# EAGLE board DMB-4770-8-IN-8-OUT (EAGLE 6.5.0)
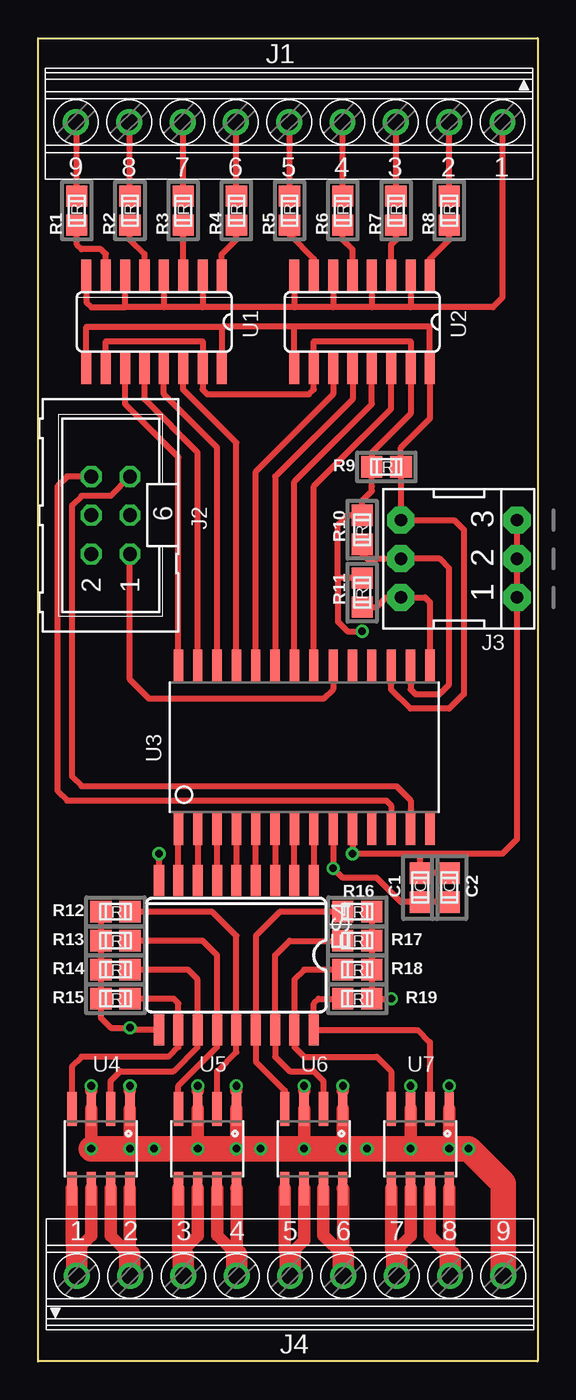
[diagram p0: board, top side]
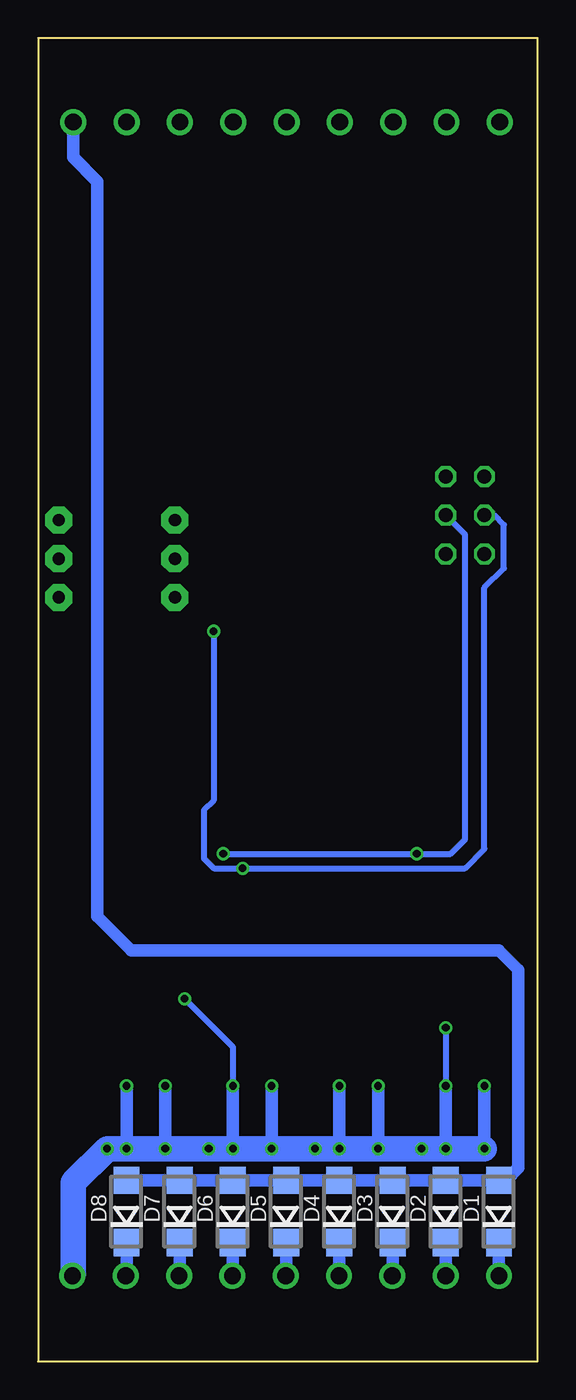
[diagram p1: board, bottom side, seen from below]

Size 32.79 x 86.89 mm. Coordinates in mm from the lower left corner, seen from the top.
Outline: 0,86.89 32.79,86.89 32.79,0 0,0 0,86.89
Copper layers (1*16): Top 0.0356mm / dielectric 1.5011mm / Bottom 0.0356mm
Design rules "LaenPCBOrder": minimum track width 6mil, minimum drill 13mil, track to track 6mil, track to pad 6mil, pad to pad 6mil, via to via 6mil, smd to smd 6mil, copper to edge 15mil, drill to drill 6mil, minimum pad ring 7mil, minimum via ring 7mil, stop-mask expansion 3mil, vias tented up to drill 0mil, thermal gap 10mil

## Footprints (pad centres in the part's own frame; a part is rotated, then mirrored left to right if it is on the bottom)
C0805 = smd 1.397 x 1.397: 1 -0.953,0; 2 0.953,0
DO214AC = smd 1.8 x 1.7: A 2.05,0; C -2.05,0
SO18L = smd 0.66 x 2.032: 1 -0.635,-4.902; 2 0.635,-4.902; 3 1.905,-4.902; 4 3.175,-4.902; 5 4.445,-4.902; 6 5.715,-4.902; 7 6.985,-4.902; 8 8.255,-4.902; 9 9.525,-4.902; 10 9.525,4.902; 11 8.255,4.902; 12 6.985,4.902; 13 5.715,4.902; 14 4.445,4.902; 15 3.175,4.902; 16 1.905,4.902; 17 0.635,4.902; 18 -0.635,4.902
1751316 = drill 1.1 pad 1.7: 1 -13.973,-0.1; 2 -10.473,-0.1; 3 -6.973,-0.1; 4 -3.473,-0.1; 5 0.028,-0.1; 6 3.527,-0.1; 7 7.027,-0.1; 8 10.527,-0.1; 9 14.027,-0.1
ML6 = drill 0.914 octagon: 1 -2.54,-1.27; 2 -2.54,1.27; 3 0,-1.27; 4 0,1.27; 5 2.54,-1.27; 6 2.54,1.27
EPG-03-SMALL = drill 0.813 pad 1.778 octagon: 1 -2.54,-3.81; 2 0,-3.81; 3 2.54,-3.81; 4 2.54,3.81; 5 0,3.81; 6 -2.54,3.81
R0805 = smd 1.397 x 1.397: 1 -0.953,0; 2 0.953,0
SO16 = smd 0.66 x 2.032: 1 -4.445,-3.073; 2 -3.175,-3.073; 3 -1.905,-3.073; 4 -0.635,-3.073; 5 0.635,-3.073; 6 1.905,-3.073; 7 3.175,-3.073; 8 4.445,-3.073; 9 4.445,3.073; 10 3.175,3.073; 11 1.905,3.073; 12 0.635,3.073; 13 -0.635,3.073; 14 -1.905,3.073; 15 -3.175,3.073; 16 -4.445,3.073
SO28-3 = smd 0.61 x 2.21: 1 -8.255,-5.315; 2 -6.985,-5.315; 3 -5.715,-5.315; 4 -4.445,-5.315; 5 -3.175,-5.315; 6 -1.905,-5.315; 7 -0.635,-5.315; 8 0.635,-5.315; 9 1.905,-5.315; 10 3.175,-5.315; 11 4.445,-5.315; 12 5.715,-5.315; 13 6.985,-5.315; 14 8.255,-5.315; 15 8.255,5.315; 16 6.985,5.315; 17 5.715,5.315; 18 4.445,5.315; 19 3.175,5.315; 20 1.905,5.315; 21 0.635,5.315; 22 -0.635,5.315; 23 -1.905,5.315; 24 -3.175,5.315; 25 -4.445,5.315; 26 -5.715,5.315; 27 -6.985,5.315; 28 -8.255,5.315
SOIC8 = smd 0.61 x 2.21: 1 -1.905,-2.616; 2 -0.635,-2.616; 3 0.635,-2.616; 4 1.905,-2.616; 5 1.905,2.616; 6 0.635,2.616; 7 -0.635,2.616; 8 -1.905,2.616

## Placement (x,y rotation side)
C1  100n  [C0805]  25.08,31.11 90 top
C2  1u  [C0805]  26.99,31.11 90 top
D1  [DO214AC]  2.54,9.84 90 bottom
D2  [DO214AC]  6.03,9.84 90 bottom
D3  [DO214AC]  9.53,9.84 90 bottom
D4  [DO214AC]  13.02,9.84 90 bottom
D5  [DO214AC]  16.51,9.84 90 bottom
D6  [DO214AC]  20,9.84 90 bottom
D7  [DO214AC]  23.5,9.84 90 bottom
D8  [DO214AC]  26.99,9.84 90 bottom
E$4  ULN2803  [SO18L]  17.46,26.67 180 top
J1  [1751316]  16.51,81.28 180 top
J2  [ML6]  4.76,55.56 90 top
J3  [EPG-03-SMALL]  27.62,52.7 90 top
J4  [1751316]  16.51,5.71 0 top
R1  1.30K  [R0805]  2.54,75.56 90 top
R2  1.30K  [R0805]  6.03,75.56 90 top
R3  1.30K  [R0805]  9.53,75.56 90 top
R4  1.30K  [R0805]  13.02,75.56 90 top
R5  1.30K  [R0805]  16.51,75.56 90 top
R6  1.30K  [R0805]  20,75.56 90 top
R7  1.30K  [R0805]  23.5,75.56 90 top
R8  1.30K  [R0805]  26.99,75.56 90 top
R9  10K  [R0805]  22.86,58.74 0 top
R10  10K  [R0805]  21.27,54.61 270 top
R11  10K  [R0805]  21.27,50.48 270 top
R12  10K  [R0805]  5.08,29.53 0 top
R13  10K  [R0805]  5.08,27.62 0 top
R14  10K  [R0805]  5.08,25.72 0 top
R15  10K  [R0805]  5.08,23.81 0 top
R16  10K  [R0805]  20.95,29.53 0 top
R17  10K  [R0805]  20.95,27.62 0 top
R18  10K  [R0805]  20.95,25.72 0 top
R19  10K  [R0805]  20.95,23.81 0 top
U1  ACSL-6400  [SO16]  7.62,68.26 180 top
U2  ACSL-6400  [SO16]  21.27,68.26 180 top
U3  [SO28-3]  17.46,40.32 0 top
U4  [SOIC8]  4.13,13.97 180 top
U5  [SOIC8]  11.11,13.97 180 top
U6  [SOIC8]  18.1,13.97 180 top
U7  [SOIC8]  25.08,13.97 180 top

## Library data of the parts
C1 C2 R1-R19 = divers
D1-D8 = ref-packages
E$4 = SparkFun-PowerIC
J1 J4 = con-phoenix-350
J2 = con-harting-ml
J3 = special
U1 U2 = linear
U3 = burr-brown
U4-U7 = SparkFun-AnalogIC

## Nets
3V3: C1.1 C2.1 J2.4 R9.1 R10.1 R11.1 U1.10 U1.15 U2.10 U2.15 U3.9
GND: J3.4 R9.2 U1.9 U1.16 U2.9 U2.16 U3.17
POWER_GND: D1.A D2.A D3.A D4.A D5.A D6.A D7.A D8.A J1.1 U1.2 U1.4 U1.6 U1.8 U2.2 U2.4 U2.6 U2.8
S$8: D1.C J4.1 U4.5 U4.6
S$9: D2.C J4.2 U4.7 U4.8
S$10: D3.C J4.3 U5.5 U5.6
S$11: D4.C J4.4 U5.7 U5.8
S$13: D5.C J4.5 U6.5 U6.6
S$14: D6.C J4.6 U6.7 U6.8
S$15: D7.C J4.7 U7.5 U7.6
S$16: D8.C J4.8 U7.7 U7.8
S$20: E$4.11 R15.2 U4.4
S$21: E$4.12 R14.2 U4.2
S$23: E$4.13 R13.2 U5.4
S$25: E$4.14 R12.2 U5.2
S$28: E$4.15 R16.1 U6.4
S$29: E$4.16 R17.1 U6.2
S$31: E$4.17 R18.1 U7.4
S$32: E$4.18 R19.1 U7.2
S$33: E$4.8 U3.1
S$34: E$4.7 U3.2
S$35: E$4.6 U3.3
S$38: E$4.5 U3.4
S$39: E$4.4 U3.5
S$40: E$4.3 U3.6
S$41: E$4.2 U3.7
S$42: E$4.1 U3.8
S$47: R8.1 U2.1
S$48: J2.6 U3.12
S$49: J2.5 U3.13
S$50: C1.2 C2.2 E$4.9 J2.3 J3.1 J3.2 J3.3 U3.10
S$55: R7.1 U2.3
S$59: J2.1 U3.20
S$66: J3.6 R11.2 U3.15
S$67: J3.5 R10.2 U3.16
S$71: R6.1 U2.5
S$72: R5.1 U2.7
S$73: R4.1 U1.1
S$74: R3.1 U1.3
S$75: R2.1 U1.5
S$76: R1.1 U1.7
S$77: J1.9 R1.2
S$78: J1.8 R2.2
S$79: J1.7 R3.2
S$80: J1.6 R4.2
S$81: J1.5 R5.2
S$82: J1.4 R6.2
S$83: J1.3 R7.2
S$84: J1.2 R8.2
S$89: U1.11 U3.28
S$90: U1.12 U3.27
S$91: U1.13 U3.26
S$92: U1.14 U3.25
S$93: U2.11 U3.24
S$94: U2.12 U3.23
S$95: U2.13 U3.22
S$96: U2.14 U3.21
VCOM: E$4.10 J4.9 R12.1 R13.1 R14.1 R15.1 R16.2 R17.2 R18.2 R19.2 U4.1 U4.3 U5.1 U5.3 U6.1 U6.3 U7.1 U7.3

## Tracks (layer width: path | path; a pad name or v marks a point on that pad's centre or on a via)
3V3  (via drill 0.5)
  Top 0.406: U1.10 4.45,66.99 10.79,66.99 U1.15 10.79,63.82 11.11,63.5 17.78,63.5 18.1,63.82 U2.10 18.1,66.99 24.45,66.99 U2.15 24.45,62.23 21.91,59.69 R9.1 21.91,57.47 21.91,57.15 21.27,56.52 R10.1 20.32,55.56 19.68,54.93 19.68,51.44 | U3.9 v19.37,32.38 20,31.75 22.23,31.75 23.81,30.16 C1.1 C2.1 | 19.68,51.44 19.68,48.58 20.32,47.94 v21.27,47.94 | R11.1 19.68,51.44
  Bottom 0.406: J2.4 2.86,55.56 2.22,54.93 2.22,52.07 3.49,50.8 3.49,33.66 4.76,32.38 v19.37,32.38 21.27,32.38 21.91,33.02 21.91,36.2 21.27,36.83 v21.27,47.94
GND
  Top 0.406: U1.9 3.17,67.94 12.06,67.94 | 12.06,67.94 U1.16 | U2.9 16.83,67.94 | 16.83,67.94 12.06,67.94 | 16.83,67.94 25.72,67.94 U2.16 25.72,61.91 23.81,60.01 R9.2 J3.4 27.3,55.24 27.94,54.61 27.94,43.81 26.99,42.86 24.45,42.86 23.18,44.13 U3.17
POWER_GND
  Top 0.406: U1.8 3.17,69.53 3.49,69.22 5.71,69.22 | 5.71,69.22 U1.6 | U1.4 8.26,69.22 | 8.26,69.22 5.71,69.22 | U1.2 10.79,69.22 | 10.79,69.22 8.26,69.22 | U2.8 16.83,69.22 | 16.83,69.22 10.79,69.22 | U2.6 19.37,69.22 | 19.37,69.22 16.83,69.22 | U2.4 21.91,69.22 | 21.91,69.22 19.37,69.22 | U2.2 24.45,69.22 | 24.45,69.22 21.91,69.22 | J1.1 30.48,69.85 29.84,69.22 24.45,69.22
  Bottom 0.813: D8.A D7.A D6.A D5.A 13.8,11.89 13.65,11.75 13.16,11.75 D4.A D3.A D2.A D1.A 2.08,11.89 1.27,12.7 1.27,25.72 2.54,26.99 26.67,26.99 28.89,29.21 28.89,77.47 30.48,79.06 J1.1
S$8
  Top 0.813: U4.5 2.22,7.62 2.54,7.3 3.49,8.26 U4.6
  Top 1.422: J4.1 2.54,7.3
  Bottom 0.813: D1.C J4.1
S$9
  Top 0.813: U4.8 6.03,6.99 4.76,8.26 U4.7 | J4.2
  Top 1.422: 6.03,6.99 J4.2
  Bottom 0.813: J4.2 D2.C
S$10
  Top 0.813: 9.54,6.97 9.37,7.14 | 9.37,7.14 9.21,7.3 U5.5 | U5.6 10.48,8.26 9.37,7.14
  Top 1.422: J4.3 9.54,6.97
  Bottom 0.813: D3.C 9.53,5.63 J4.3
S$11
  Top 0.813: U5.8 13.04,11.33 13.04,6.99 11.75,8.28 U5.7
  Top 1.422: J4.4 13.04,6.99
  Bottom 0.813: D4.C 13.02,5.63 J4.4
S$13
  Top 0.813: 16.54,6.96 16.51,6.99 | 16.51,6.99 16.19,7.3 U6.5 | U6.6 17.46,7.94 16.51,6.99
  Top 1.422: J4.5 16.54,6.96
  Bottom 0.813: D5.C 16.51,5.64 J4.5
S$14
  Top 0.813: U6.8 20.04,11.32 20.04,6.99 18.73,8.29 U6.7
  Top 1.422: J4.6 20.04,6.99
  Bottom 0.813: D6.C 20,5.65 J4.6
S$15
  Top 0.813: 23.54,6.94 23.34,7.14 | 23.34,7.14 23.18,7.3 U7.5 | U7.6 24.45,8.26 23.34,7.14
  Top 1.422: J4.7 23.54,6.94
  Bottom 0.813: D7.C 23.5,5.66 J4.7
S$16
  Top 0.813: 27.04,6.93 26.99,6.99 | 26.99,6.99 U7.8 | U7.7 25.72,8.26 26.99,6.99
  Top 1.422: J4.8 27.04,6.93
  Bottom 0.813: D8.C 26.99,5.67 J4.8
S$20
  Top 0.406: U4.4 2.22,19.37 2.86,20 8.57,20 9.21,20.64 E$4.11 9.21,23.5 8.89,23.81 R15.2
S$21
  Top 0.406: U4.2 4.76,18.41 5.4,19.05 8.89,19.05 10.48,20.64 E$4.12 10.48,25.08 9.84,25.72 R14.2
S$23
  Top 0.406: U5.4 9.21,18.1 11.75,20.64 E$4.13 11.75,26.67 10.79,27.62 R13.2
S$25
  Top 0.406: U5.2 11.75,19.05 13.02,20.32 E$4.14 13.02,27.94 11.43,29.53 R12.2
S$28
  Top 0.406: U6.4 16.19,17.78 14.29,19.68 E$4.15 14.29,27.94 15.88,29.53 R16.1
S$29
  Top 0.406: U6.2 18.73,18.41 18.1,19.05 16.51,19.05 15.56,20 E$4.16 15.56,26.67 16.51,27.62 R17.1
S$31
  Top 0.406: U7.4 23.18,19.05 22.23,20 17.46,20 16.83,20.64 E$4.17 16.83,25.08 17.46,25.72 R18.1
S$32
  Top 0.406: U7.2 25.72,20.95 24.91,21.77 E$4.18 18.1,23.5 18.41,23.81 R19.1
S$33
  Top 0.406: E$4.8 U3.1
S$34
  Top 0.406: U3.2 E$4.7
S$35
  Top 0.406: E$4.6 U3.3
S$38
  Top 0.406: U3.4 E$4.5
S$39
  Top 0.406: E$4.4 U3.5
S$40
  Top 0.406: U3.6 E$4.3
S$41
  Top 0.406: E$4.2 U3.7
S$42
  Top 0.406: U3.8 E$4.1
S$47
  Top 0.406: U2.1 25.72,72.39 26.99,73.66 R8.1 | R8.1
S$48
  Top 0.406: J2.6 1.91,58.1 1.27,57.47 1.27,37.47 1.91,36.83 22.86,36.83 23.18,36.51 U3.12
S$49
  Top 0.406: J2.5 4.76,56.83 2.86,56.83 2.22,56.2 2.22,38.42 2.86,37.78 23.5,37.78 24.45,36.83 U3.13
S$50  (via drill 0.5)
  Top 0.406: U3.10 v20.64,33.34 25.08,33.34 | E$4.9 v7.94,33.34 | J3.3 J3.2 J3.1 31.43,34.29 30.48,33.34 25.08,33.34 | 25.08,33.34 C1.2 C2.2
  Bottom 0.406: v20.64,33.34 v7.94,33.34 5.71,33.34 4.76,34.29 4.76,54.29 J2.3
S$55
  Top 0.406: U2.3 23.18,73.34 23.5,73.66 R7.1 | R7.1
S$59
  Top 0.406: U3.20 19.37,44.13 18.73,43.5 7.3,43.5 6.03,44.77 J2.1
S$66
  Top 0.406: U3.15 25.72,49.85 25.4,50.16 J3.6 22.86,50.16 22.23,49.53 R11.2
S$67
  Top 0.406: U3.16 24.45,44.13 24.77,43.81 26.35,43.81 26.99,44.45 26.99,52.07 26.35,52.7 J3.5 21.59,52.7 21.27,53.02 R10.2
S$71
  Top 0.406: U2.5 20.64,73.03 20,73.66 R6.1 | R6.1
S$72
  Top 0.406: U2.7 18.1,72.39 16.51,73.98 R5.1 | R5.1
S$73
  Top 0.406: U1.1 12.06,72.71 13.02,73.66 R4.1 | R4.1
S$74
  Top 0.406: U1.3 R3.1 | R3.1
S$75
  Top 0.406: U1.5 6.99,72.71 6.03,73.66 R2.1
S$76
  Top 0.406: U1.7 4.45,72.71 4.13,73.03 2.86,73.03 2.54,73.34 R1.1 | R1.1
S$77
  Top 0.406: R1.2 2.54,81.32 J1.9
S$78
  Top 0.406: R2.2 6.03,81.33 J1.8
S$79
  Top 0.406: R3.2 9.53,81.34 J1.7
S$80
  Top 0.406: R4.2 13.02,81.34 J1.6
S$81
  Top 0.406: R5.2 16.51,81.35 J1.5
S$82
  Top 0.406: R6.2 20,81.36 J1.4
S$83
  Top 0.406: R7.2 23.5,81.37 J1.3
S$84
  Top 0.406: R8.2 J1.2
S$89
  Top 0.406: U3.28 9.21,59.37 5.71,62.87 U1.11
S$90
  Top 0.406: U3.27 10.48,59.69 6.99,63.18 U1.12
S$91
  Top 0.406: U3.26 11.75,60.01 8.26,63.5 U1.13
S$92
  Top 0.406: U3.25 13.02,60.33 9.53,63.82 U1.14
S$93
  Top 0.406: U3.24 14.29,58.42 19.37,63.5 U2.11
S$94
  Top 0.406: U2.12 20.64,63.18 15.56,58.1 U3.23
S$95
  Top 0.406: U3.22 16.83,57.78 21.91,62.87 U2.13
S$96
  Top 0.406: U3.21 18.1,57.47 23.18,62.55 U2.14
VCOM  (via drill 0.5)
  Top 0.406: E$4.10 6.21,21.77 v6.03,21.91 4.76,21.91 4.13,22.54 R15.1 R14.1 R13.1 R12.1 | R16.2 R17.2 R18.2 R19.2 v23.18,23.81
  Top 0.813: v3.49,13.97 U4.3 | U5.3 v10.48,13.97 | U6.3 v17.46,13.97 | U6.1 v20,13.97 | U7.1 v26.99,13.97 | U7.3 v24.45,13.97 | U5.1 v13.02,13.97 | U4.1 v6.03,13.97 | v3.49,18.1 3.49,17.78 | v6.03,18.1 6.03,17.78 | v10.48,18.1 10.48,17.78 | v13.02,18.1 13.02,17.78 | v17.46,18.1 17.46,17.78 | v20,18.1 20,17.78
  Top 1.676: v3.49,13.97 v6.03,13.97 v7.62,13.97 v10.48,13.97 v13.02,13.97 v14.61,13.97 v17.46,13.97 v20,13.97 v21.59,13.97 v24.45,13.97 v26.99,13.97 v28.26,13.97 30.54,11.69 J4.9
  Bottom 0.406: v6.03,21.91 v6.03,18.1 | v23.18,23.81 20,20.64 v20,18.1
  Bottom 0.813: v3.49,18.1 v3.49,13.97 | v6.03,18.1 v6.03,13.97 | v10.48,18.1 v10.48,13.97 | v13.02,18.1 v13.02,13.97 | v17.46,18.1 v17.46,13.97 | v20,18.1 v20,13.97 | v24.45,18.1 v24.45,13.97 | v26.99,18.1 v26.99,13.97
  Bottom 1.676: 30.48,5.71 30.48,11.75 v28.26,13.97 v21.59,13.97 v14.61,13.97 v7.62,13.97 v3.49,13.97